# Altium PCB FRONT_BOARD.PcbDoc
Units mil, origin at the board's own origin, x right, y up, seen from the top; angles counter-clockwise.
Board outline 6000 x 4000 mil, 2 copper layers (Top Layer, Bottom Layer); 33 components, 17 nets, 89 pads, 0 vias.
Unrouted connection lines stored in the file: 64.
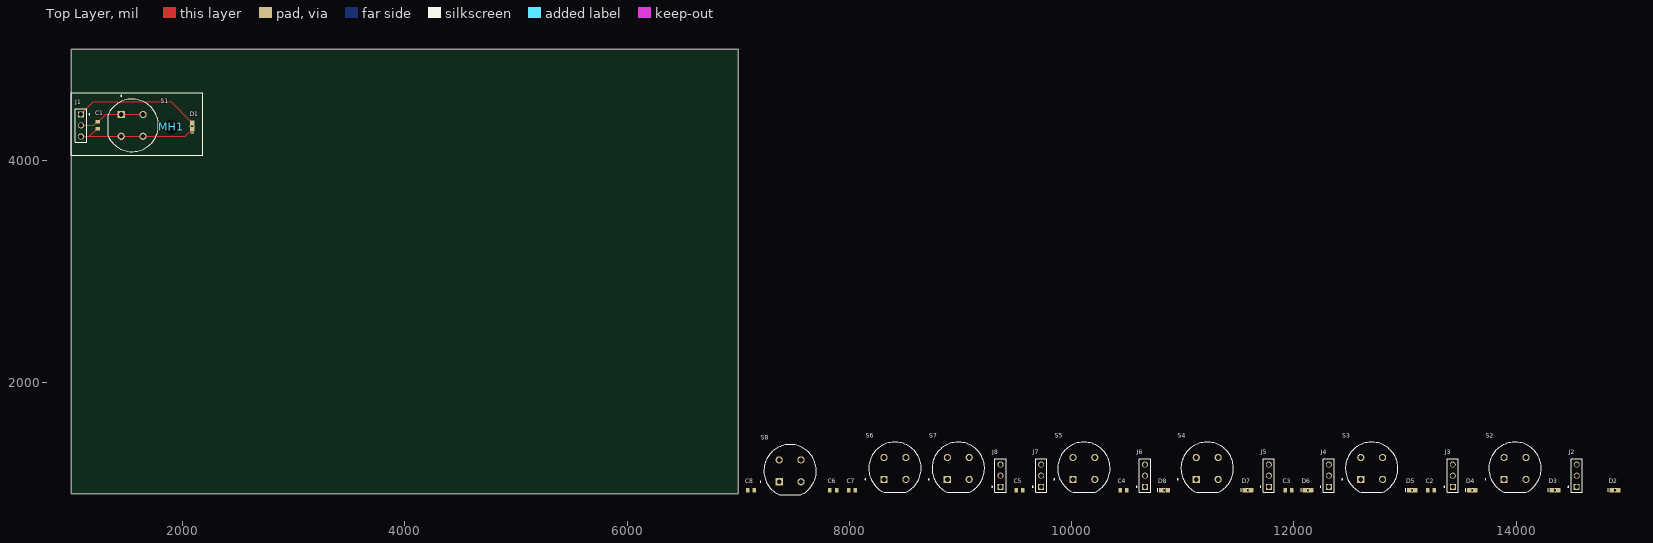
[diagram p0: Top Layer view]
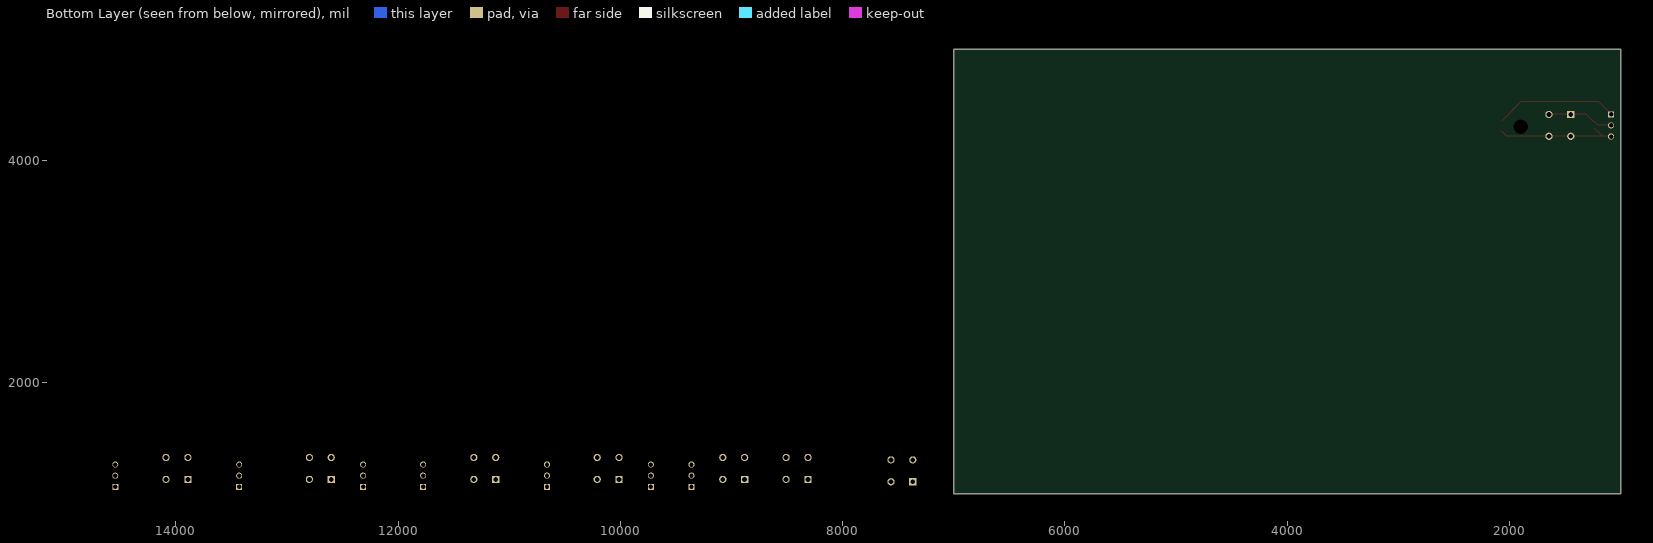
[diagram p1: Bottom Layer view, seen from below]

## Layer stack, top to bottom
Top Solder: solder mask 0.4, Solder Resist, Dk 3.5
Top Layer: signal copper 1.4
Dielectric 1: dielectric 12.6, FR-4, Dk 4.8
Bottom Layer: signal copper 1.4
Bottom Solder: solder mask 0.4, Solder Resist, Dk 3.5

## Board outline
1000,1000 7000,1000 7000,5000 1000,5000

## Design rules (kind name [scope] priority, off if disabled: settings)
Clearance [All] p1: gap=10 ignorepadtopadclearanceinfootprint=FALSE
PolygonConnect [All] p1: connectstyle=Relief reliefconductorwidth=10 reliefentries=4 polygonreliefangle="90 Angle" airgapwidth=10
RoutingVias [All] p1: holewidth=28 width=50 viastyle="Through Hole" minholewidth=28 minwidth=50 maxholewidth=28 maxwidth=50
SolderMaskExpansion [All] p1: expansion=4 istentingtop=FALSE
SupplyNets "Schematic Supply Nets" [InNet('GND')] p1: voltage=0.000
Width [All] p1: maxlimit=10 minlimit=10 preferedwidth=10
30 further rules are at their usual default settings.

## Components (designator, comment, footprint, x,y, rotation, side; value= is the part's Value field where it differs from the comment)
C1 "100n" C0603 1235.24,4317.91 r270 top
C2 "100n" C0603 13235,1035 r0 top
C3 "100n" C0603 11950,1035 r0 top
C4 "100n" C0603 10465,1035 r0 top
C5 "100n" C0603 9530,1035 r0 top
C6 "100n" C0603 7855,1035 r0 top
C7 "100n" C0603 8025,1035 r0 top
C8 "100n" C0603 7115,1035 r0 top
D1 "LED0603" LED0603 2086.61,4310.04 r90 top
D2 "LED0603" LED0603 14890,1035 r0 top
D3 "LED0603" LED0603 14350,1035 r0 top
D4 "LED0603" LED0603 13605,1035 r0 top
D5 "LED0603" LED0603 13065,1035 r0 top
D6 "LED0603" LED0603 12125,1035 r0 top
D7 "LED0603" LED0603 11585,1035 r0 top
D8 "LED0603" LED0603 10835,1035 r0 top
J1 "TSW-101-23-T-T" SAMTEC_TSW-101-23-T-T 1085.54,4416.45 r180 top
J2 "TSW-101-23-T-T" SAMTEC_TSW-101-23-T-T 14545,1065 r0 top
J3 "TSW-101-23-T-T" SAMTEC_TSW-101-23-T-T 13430,1065 r0 top
J4 "TSW-101-23-T-T" SAMTEC_TSW-101-23-T-T 12315,1065 r0 top
J5 "TSW-101-23-T-T" SAMTEC_TSW-101-23-T-T 11775,1065 r0 top
J6 "TSW-101-23-T-T" SAMTEC_TSW-101-23-T-T 10660,1065 r0 top
J7 "TSW-101-23-T-T" SAMTEC_TSW-101-23-T-T 9725,1065 r0 top
J8 "TSW-101-23-T-T" SAMTEC_TSW-101-23-T-T 9360,1065 r0 top
MH1 "M3 Mounting Hole" "Copy of M4 Mounting Hole" 1899.61,4304.13 r0 top
S1 "KS-01Q-01" SW_KS-01Q-01 1546.26,4316.93 r270 top
S2 "KS-01Q-01" SW_KS-01Q-01 13990,1230 r0 top
S3 "KS-01Q-01" SW_KS-01Q-01 12700,1230 r0 top
S4 "KS-01Q-01" SW_KS-01Q-01 11220,1230 r0 top
S5 "KS-01Q-01" SW_KS-01Q-01 10110,1230 r0 top
S6 "KS-01Q-01" SW_KS-01Q-01 8410,1230 r0 top
S7 "KS-01Q-01" SW_KS-01Q-01 8980,1230 r0 top
S8 "KS-01Q-01" SW_KS-01Q-01 7466.57,1208.43 r0 top

## Footprints (in the part's own frame and the unit in brackets; to place one, negate y for a bottom-side part, rotate by r counter-clockwise, add the part's x,y. Pads: shape width x height; smd on the part's side, far side on the other; paste and mask are expansions set on the pad)
C0603 [mm] "Generic 0603 SMD Ceramic Capacitor Footprint"
  rrect5% 0.8x1 smd: 1(-0.75,0) 2(0.75,0)
  body extent -0.87,-0.48 0.87,0.48, height 0.95
"Copy of M4 Mounting Hole" [mm]
  round 0 hole 3.3 unplated mask+0.051: 1(0,0)
LED0603 [mm] "0603 LED footprint"
  rrect5% 1.05x1 smd: A(0.725,0) K(-0.725,0)
  silkscreen extent -1.52,-0.42 0.11,0.43, body extent -0.81,-0.41 0.81,0.41, height 0.95
SAMTEC_TSW-101-23-T-T [mm]
  rect 1.37x1.37 hole 1.02: 01(0,0)
  round 1.37 hole 1.02: 02(0,2.54) 03(0,5.08)
  silkscreen extent -2.02,-1.27 1.27,6.35
SW_KS-01Q-01 [mm]
  rect 1.65x1.65 / inner round 1.65 / far side rect 1.65x1.65 hole 1.1: 1(-2.5,-2.5)
  round 1.65 hole 1.1: 2(2.5,-2.5) 3(-2.5,2.5) 4(2.5,2.5)
  silkscreen extent -6.85,-5.5 6,6, body extent -6,-5.5 6,6, height 14.35

## Part data
C1 C2 C3 C4 C5 C6 C7 C8: library part CMP-00024-8, "Generic 0603 SMD Ceramic Capacitor"
D1 D2 D3 D4 D5 D6 D7 D8: library part CMP-00036-7, "0603 LED"
J1 J2 J3 J4 J5 J6 J7 J8 S1 S2 S3 S4 S5 S6 S7 S8: Package=None, Availability=Unavailable, Price=None
  J1 J2 J3 J4 J5 J6 J7 J8: MP=TSW-101-23-T-T
  S1 S2 S3 S4 S5 S6 S7 S8: MP=KS-01Q-01
MH1: library part CONN-00002-1, Manufacturer=Molex

## Nets (pads, with @x,y where several pads share a name; then routed paths per layer and width w, separated by ;. In a path a pad name is that pad's centre, name@x,y a point inside that pad or via, vN(x,y) a via of type N, cw(c..) or ccw(c..) an arc to the next point about the centre after c; other vN are vias at no path point)
BUTTON_B0: C1.1 J1.02 S1.1 S1.3 | length 600.1
  Top Layer w10: J1.02 1200.31,4316.45 1231.3,4347.44 1239.17,4347.44 1307.09,4415.35 S1.1 S1.3
BUTTON_B1: C2.1 J2.02 S2.1 S2.3
BUTTON_B2: C3.1 J3.02 S3.1 S3.3
BUTTON_B3: C4.1 J4.02 S4.1 S4.3
BUTTON_B4: C5.1 J5.02 S5.1 S5.3
BUTTON_B5: C6.1 J6.02 S6.1 S6.3
BUTTON_B6: C8.1 J7.02 S8.1 S8.3
BUTTON_B7: C7.1 J8.02 S7.1 S7.3
GND: C1.2 C2.2 C3.2 C4.2 C5.2 C6.2 C7.2 C8.2 D1.K D2.K D3.K D4.K D5.K D6.K D7.K D8.K J1.03 J2.03 J3.03 J4.03 J5.03 J6.03 J7.03 J8.03 MH1.1 S1.2 S1.4 S2.2 S2.4 S3.2 S3.4 S4.2 S4.4 S5.2 S5.4 S6.2 S6.4 S7.2 S7.4 S8.2 S8.4 | length 1113.3
  Top Layer w10: J1.03@1083.66,4214.57 1087.43,4218.33 1159.45,4218.33 ; C1.2 1231.3,4288.39 1161.25,4218.33 1159.45,4218.33 ; D1.K@2070.94,4265.83 2023.62,4218.5 S1.4 S1.2 1305.12,4218.5 1304.95,4218.33 1159.45,4218.33
LED_B0: D1.A J1.01 | length 1104
  Top Layer w10: J1.01 1197.64,4528.54 1896.65,4528.54 D1.A@2070.94,4354.25
LED_B1: D2.A J2.01
LED_B2: D3.A J3.01
LED_B3: D4.A J4.01
LED_B4: D5.A J5.01
LED_B5: D6.A J6.01
LED_B6: D7.A J7.01
LED_B7: D8.A J8.01

## Silkscreen, mask and mechanical layers (free items; w line width, h text height)
Top Overlay:
  lines w10: 1000,4047.24 1000,4612.2 2182.09,4612.2 2182.09,4047.24 1000,4047.24